# EAGLE board startlight.decoder.panel (EAGLE 7.3.0)
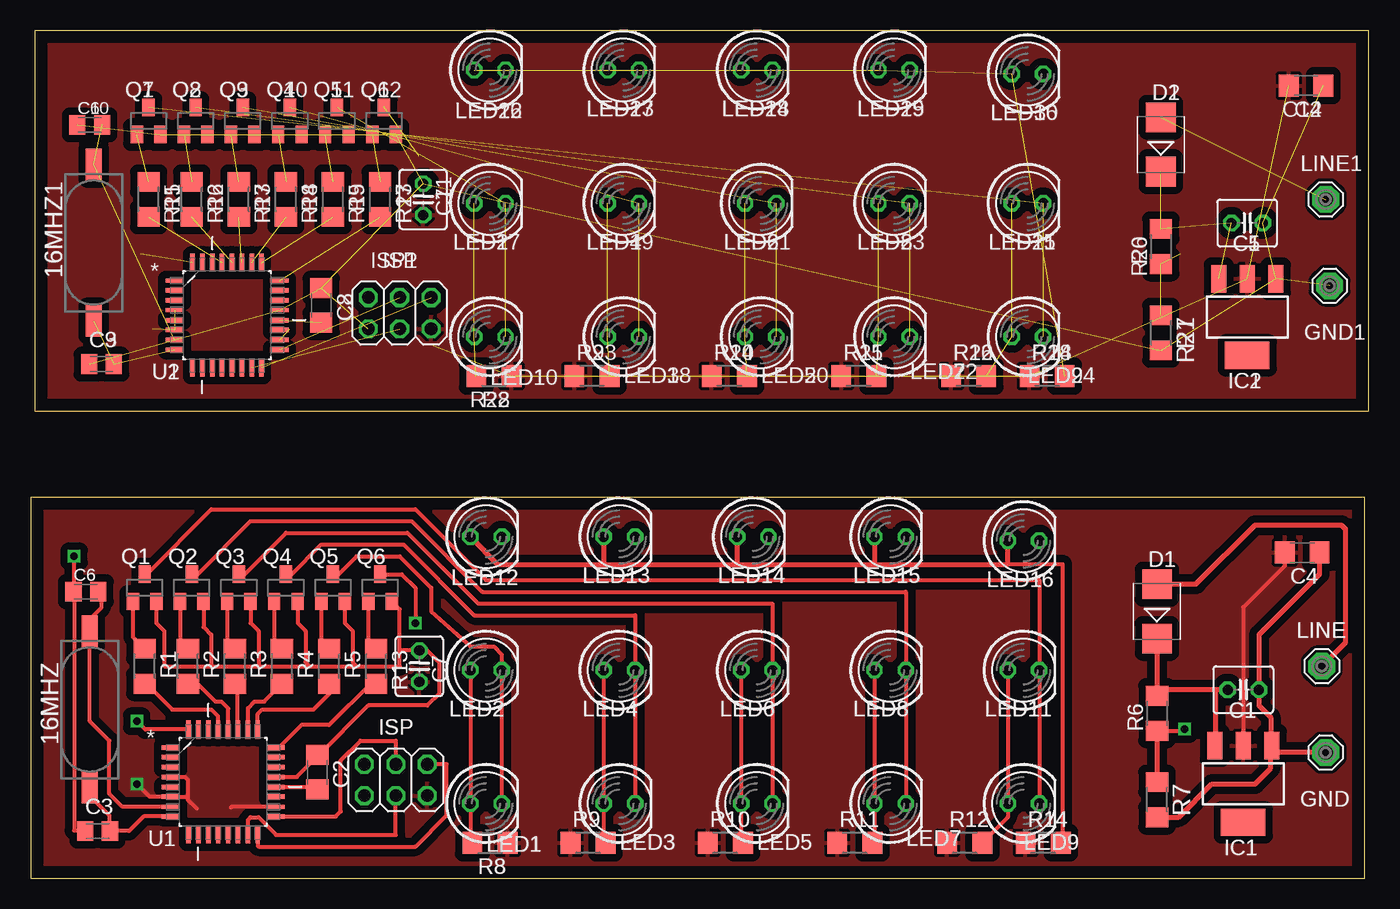
[diagram p0: board, top side]
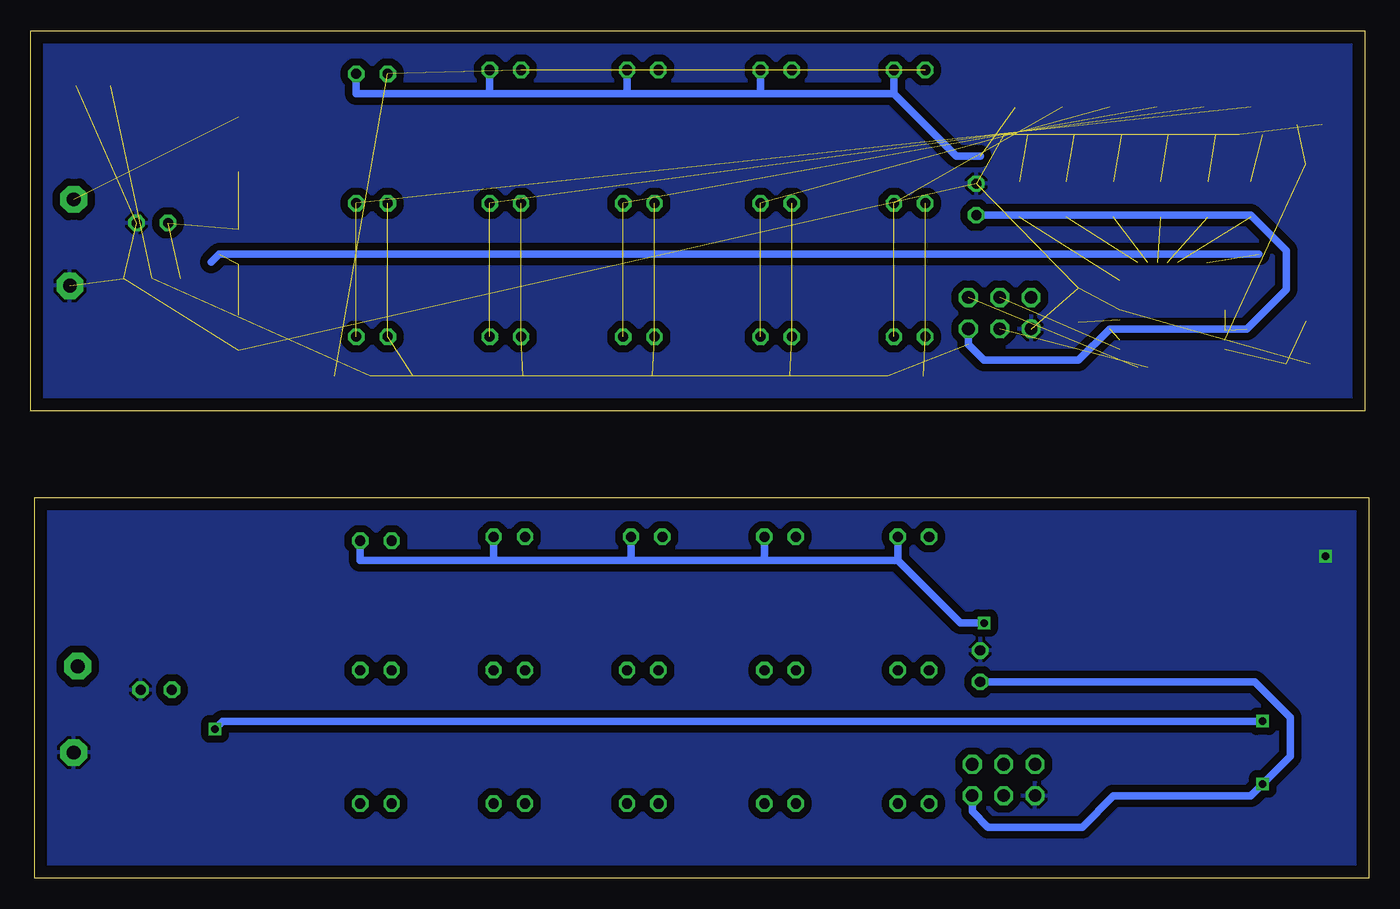
[diagram p1: board, bottom side, seen from below]

Size 108.25 x 68.57 mm. Coordinates in mm from the lower left corner, seen from the top.
Outline: 0,0 107.93,0 107.93,30.79 0,30.79 0,0
Outline: 0.32,37.78 108.25,37.78 108.25,68.57 0.32,68.57 0.32,37.78
Copper layers (1*16): Top 0.035mm / dielectric 1.5mm / Bottom 0.035mm
Design rules "default": minimum track width 10mil, minimum drill 24mil, track to track 8mil, track to pad 8mil, pad to pad 8mil, via to via 8mil, smd to smd 8mil, copper to edge 40mil, drill to drill 8mil, minimum pad ring 10mil, minimum via ring 8mil, stop-mask expansion 4mil, vias tented up to drill 0mil, thermal gap 10mil
Net classes: 0 default: width 0.406 mm, drill 0.406 mm, clearance 0.406 mm

## Footprints (pad centres in the part's own frame; a part is rotated, then mirrored left to right if it is on the bottom)
CSM-7X-DU = smd 2.54 x 1.27: 1 -6.338,0; 2 6.338,0
C025-040X050 = drill 0.813 octagon: 1 -1.27,0; 2 1.27,0
C1206 = smd 1.6 x 1.8: 1 -1.4,0; 2 1.4,0
C0805K = smd 1.3 x 1.6: 1 -1,0; 2 1,0
SMB = smd 2.4 x 2.4: A 2.2,0; C -2.2,0
SE11 = drill 1.118 pad 2.159 octagon: MP 0,0
SOT223 = smd 1.219 x 2.235: 1 -2.311,-3.099; 2 0,-3.099; 3 2.311,-3.099 | smd 3.6 x 2.2: 4 0,3.099
2X03 = drill 1.016 octagon: 1 -2.54,-1.27; 2 -2.54,1.27; 3 0,-1.27; 4 0,1.27; 5 2.54,-1.27; 6 2.54,1.27
LED5MM = drill 0.813 octagon: A -1.27,0; K 1.27,0
SOT23 = smd 1 x 1.4: 1 -0.95,-1.1; 2 0.95,-1.1; 3 0,1.1
R1206 = smd 1.6 x 1.803: 1 -1.422,0; 2 1.422,0
QFP80P900X900X120-32N = smd 1.473 x 0.356: 1 -4.242,2.794; 2 -4.242,2.007; 3 -4.242,1.194; 4 -4.242,0.406; 5 -4.242,-0.406; 6 -4.242,-1.194; 7 -4.242,-2.007; 8 -4.242,-2.794; 17 4.242,-2.794; 18 4.242,-2.007; 19 4.242,-1.194; 20 4.242,-0.406; 21 4.242,0.406; 22 4.242,1.194; 23 4.242,2.007; 24 4.242,2.794 | smd 0.356 x 1.473: 9 -2.794,-4.242; 10 -2.007,-4.242; 11 -1.194,-4.242; 12 -0.406,-4.242; 13 0.406,-4.242; 14 1.194,-4.242; 15 2.007,-4.242; 16 2.794,-4.242; 25 2.794,4.242; 26 2.007,4.242; 27 1.194,4.242; 28 0.406,4.242; 29 -0.406,4.242; 30 -1.194,4.242; 31 -2.007,4.242; 32 -2.794,4.242

## Placement (x,y rotation side)
16MHZ  CSM-7X-DU  [CSM-7X-DU]  4.76,13.65 90 top
16MHZ1  CSM-7X-DU  [CSM-7X-DU]  5.08,51.44 90 top
C1  100n  [C025-040X050]  98.11,15.24 0 top
C2  100n  [C1206]  23.18,8.57 270 top
C3  [C0805K]  5.4,3.81 0 top
C4  100n  [C1206]  102.87,26.35 180 top
C5  100n  [C025-040X050]  98.42,53.02 0 top
C6  [C0805K]  4.45,23.18 0 top
C7  [C025-040X050]  31.43,17.14 90 top
C8  100n  [C1206]  23.5,46.35 270 top
C9  [C0805K]  5.71,41.59 0 top
C10  [C0805K]  4.76,60.96 0 top
C11  [C025-040X050]  31.75,54.93 90 top
C12  100n  [C1206]  103.19,64.14 180 top
D1  ES2D  [SMB]  91.12,21.59 90 top
D2  ES2D  [SMB]  91.44,59.37 90 top
GND  SE11  [SE11]  104.78,10.16 0 top
GND1  SE11  [SE11]  105.09,47.94 0 top
IC1  [SOT223]  98.11,7.62 180 top
IC2  [SOT223]  98.42,45.4 180 top
ISP  [2X03]  29.53,7.94 180 top
ISP1  [2X03]  29.84,45.72 180 top
LED1  [LED5MM]  36.83,6.03 0 top
LED2  [LED5MM]  36.83,16.83 0 top
LED3  [LED5MM]  47.62,6.03 0 top
LED4  [LED5MM]  47.62,16.83 0 top
LED5  [LED5MM]  58.74,6.03 0 top
LED6  [LED5MM]  58.74,16.83 0 top
LED7  [LED5MM]  69.53,6.03 0 top
LED8  [LED5MM]  69.53,16.83 0 top
LED9  [LED5MM]  80.33,6.03 0 top
LED10  [LED5MM]  37.15,43.81 0 top
LED11  [LED5MM]  80.33,16.83 0 top
LED12  [LED5MM]  36.83,27.62 0 top
LED13  [LED5MM]  47.62,27.62 0 top
LED14  [LED5MM]  58.42,27.62 0 top
LED15  [LED5MM]  69.53,27.62 0 top
LED16  [LED5MM]  80.33,27.3 0 top
LED17  [LED5MM]  37.15,54.61 0 top
LED18  [LED5MM]  47.94,43.81 0 top
LED19  [LED5MM]  47.94,54.61 0 top
LED20  [LED5MM]  59.05,43.81 0 top
LED21  [LED5MM]  59.05,54.61 0 top
LED22  [LED5MM]  69.85,43.81 0 top
LED23  [LED5MM]  69.85,54.61 0 top
LED24  [LED5MM]  80.64,43.81 0 top
LED25  [LED5MM]  80.64,54.61 0 top
LED26  [LED5MM]  37.15,65.41 0 top
LED27  [LED5MM]  47.94,65.41 0 top
LED28  [LED5MM]  58.74,65.41 0 top
LED29  [LED5MM]  69.85,65.41 0 top
LED30  [LED5MM]  80.64,65.09 0 top
LINE  SE11  [SE11]  104.46,17.14 0 top
LINE1  SE11  [SE11]  104.78,54.93 0 top
Q1  BC846ASMD  [SOT23]  9.21,23.5 0 top
Q2  BC846ASMD  [SOT23]  13.02,23.5 0 top
Q3  BC846ASMD  [SOT23]  16.83,23.5 0 top
Q4  BC846ASMD  [SOT23]  20.64,23.5 0 top
Q5  BC846ASMD  [SOT23]  24.45,23.5 0 top
Q6  BC846ASMD  [SOT23]  28.26,23.5 0 top
Q7  BC846ASMD  [SOT23]  9.53,61.28 0 top
Q8  BC846ASMD  [SOT23]  13.34,61.28 0 top
Q9  BC846ASMD  [SOT23]  17.14,61.28 0 top
Q10  BC846ASMD  [SOT23]  20.95,61.28 0 top
Q11  BC846ASMD  [SOT23]  24.77,61.28 0 top
Q12  BC846ASMD  [SOT23]  28.57,61.28 0 top
R1  [R1206]  9.21,17.14 270 top
R2  [R1206]  12.7,17.14 270 top
R3  [R1206]  16.51,17.14 270 top
R4  [R1206]  20.32,17.14 270 top
R5  [R1206]  24.13,17.14 270 top
R6  [R1206]  91.12,13.34 90 top
R7  [R1206]  91.12,6.35 270 top
R8  [R1206]  37.15,2.86 180 top
R9  [R1206]  45.09,2.86 0 top
R10  [R1206]  56.2,2.86 0 top
R11  [R1206]  66.67,2.86 0 top
R12  [R1206]  75.56,2.86 0 top
R13  [R1206]  27.94,17.14 270 top
R14  [R1206]  81.92,2.86 0 top
R15  [R1206]  9.53,54.93 270 top
R16  [R1206]  13.02,54.93 270 top
R17  [R1206]  16.83,54.93 270 top
R18  [R1206]  20.64,54.93 270 top
R19  [R1206]  24.45,54.93 270 top
R20  [R1206]  91.44,51.12 90 top
R21  [R1206]  91.44,44.13 270 top
R22  [R1206]  37.47,40.64 180 top
R23  [R1206]  45.4,40.64 0 top
R24  [R1206]  56.52,40.64 0 top
R25  [R1206]  66.99,40.64 0 top
R26  [R1206]  75.88,40.64 0 top
R27  [R1206]  28.26,54.93 270 top
R28  [R1206]  82.23,40.64 0 top
U1  ATMEGA328P-AU  [QFP80P900X900X120-32N]  15.56,7.78 0 top
U2  ATMEGA328P-AU  [QFP80P900X900X120-32N]  15.88,45.56 0 top

## Library data of the parts
16MHZ 16MHZ1 = quarz; OC_FARNELL: unknown; OC_NEWARK: unknown
C1-C12 R1-R28 = rcl
D1 D2 = diode
GND GND1 LINE LINE1 = solpad
IC1 IC2 = sparkfun
ISP ISP1 = pinhead
LED1-LED30 = led
Q1-Q12 = transistor-npn
U1 U2 = atmega328; MPN: ATMEGA328P-AU; OC_FARNELL: 1715486; OC_NEWARK: 14R4631; PACKAGE: TQFP-32; SUPPLIER: Atmel

## Nets
GND: C1.2 C2.1 C3.1 C4.1 C6.1 C7.2 GND.MP IC1.1 ISP.6 Q1.2 Q2.2 Q3.2 Q4.2 Q5.2 Q6.2 R7.2 U1.21
GND2: C5.2 C8.1 C9.1 C10.1 C11.2 C12.1 GND1.MP IC2.1 ISP1.6 Q7.2 Q8.2 Q9.2 Q10.2 Q11.2 Q12.2 R21.2 U2.21
INT0: R6.1 R7.1 U1.32
INT2: R20.1 R21.1 U2.32
MISO: ISP.1 U1.16
MISO1: ISP1.1 U2.16
MOSI: ISP.4 U1.15
MOSI1: ISP1.4 U2.15
N$1: R5.2 U1.25
N$2: R4.2 U1.26
N$3: R3.2 U1.27
N$4: R2.2 U1.28
N$5: R1.2 U1.29
N$6: Q5.1 R5.1
N$7: Q4.1 R4.1
N$8: Q3.1 R3.1
N$9: Q2.1 R2.1
N$10: Q1.1 R1.1
N$11: D1.A LINE.MP
N$12: C1.1 D1.C IC1.3 R6.2
N$13: C2.2 U1.20
N$14: LED1.K LED2.K Q5.3
N$15: LED3.K LED4.K Q4.3
N$16: LED1.A LED2.A R8.2
N$17: LED5.K LED6.K Q3.3
N$18: LED3.A LED4.A R9.2
N$19: LED7.K LED8.K Q2.3
N$20: LED5.A LED6.A R10.2
N$21: LED9.K LED11.K Q1.3
N$22: LED7.A LED8.A R11.2
N$23: LED9.A LED11.A R12.2
N$24: Q6.1 R13.1
N$25: R13.2 U1.24
N$26: LED12.K LED13.K LED14.K LED15.K LED16.K Q6.3
N$28: LED12.A LED13.A LED14.A LED15.A LED16.A R14.2
N$29: 16MHZ1.2 C10.2 U2.7
N$30: 16MHZ.2 C6.2 U1.7
N$31: 16MHZ.1 C3.2 U1.8
N$32: 16MHZ1.1 C9.2 U2.8
N$33: R19.2 U2.25
N$34: R18.2 U2.26
N$35: R17.2 U2.27
N$36: R16.2 U2.28
N$37: R15.2 U2.29
N$38: Q11.1 R19.1
N$39: Q10.1 R18.1
N$40: Q9.1 R17.1
N$41: Q8.1 R16.1
N$42: Q7.1 R15.1
N$43: C5.1 D2.C IC2.3 R20.2
N$44: D2.A LINE1.MP
N$45: LED10.K LED17.K Q11.3
N$46: LED18.K LED19.K Q10.3
N$47: LED20.K LED21.K Q9.3
N$48: LED22.K LED23.K Q8.3
N$49: LED24.K LED25.K Q7.3
N$50: LED10.A LED17.A R22.2
N$51: LED18.A LED19.A R23.2
N$52: LED20.A LED21.A R24.2
N$53: LED22.A LED23.A R25.2
N$54: LED24.A LED25.A R26.2
N$56: Q12.1 R27.1
N$57: R27.2 U2.24
N$58: LED26.K LED27.K LED28.K LED29.K LED30.K Q12.3
N$59: LED26.A LED27.A LED28.A LED29.A LED30.A R28.2
N$60: C8.2 U2.20
RESET: ISP.5
RESET1: ISP1.5
SCK: ISP.3 U1.17
SCK1: ISP1.3 U2.17
VCC: C4.2 C7.1 IC1.2 ISP.2 R8.1 R9.1 R10.1 R11.1 R12.1 R14.1 U1.4 U1.6 U1.18
VCC1: C11.1 C12.2 IC2.2 ISP1.2 R22.1 R23.1 R24.1 R25.1 R26.1 R28.1 U2.4 U2.6 U2.18

## Tracks (layer width: path | path; a pad name or v marks a point on that pad's centre or on a via)
GND  (via drill 0.6 pad 0.61)
  Top 0.305: 14.61,17.14 10.79,17.14 10.79,20 10.16,20.64 Q1.2 | 14.61,17.14 18.41,17.14 | 18.41,17.14 22.54,17.14 | 22.54,17.14 26.35,17.14 | 26.35,17.14 29.84,17.14 29.84,18.41 | 29.84,18.41 29.84,21.76 Q6.2 | 29.84,18.41 C7.2 32.07,18.41 33.02,17.46 33.02,14.92 32.07,13.97 27.3,13.97 23.31,9.97 C2.1 23.68,9.84 23.18,9.84 21.52,8.19 U1.21 | C3.1 3.81,3.81 3.76,3.86 3.49,3.86 3.49,23.18 | C6.1 3.49,23.18 | 3.49,23.18 v3.49,26.04 | Q2.2 13.97,20.32 14.61,19.68 14.61,17.14 | Q3.2 17.78,20.64 18.41,20 18.41,17.14 | Q4.2 21.59,20.64 22.23,20 22.23,17.46 22.54,17.14 | Q5.2 25.4,20.64 26.04,20 26.04,17.46 26.35,17.14
  Top 0.406: GND.MP 100.98,10.16 100.81,10.32 | 100.81,10.32 IC1.1 100.33,10.81 100.33,13.02 99.38,13.97 C1.2 99.38,19.68 104.27,24.58 C4.1 | R7.2 92.88,4.93 95.57,7.62 99.06,7.62 100.33,8.89 100.33,9.84 100.81,10.32
  pour Bottom (isolate 0.61): 0,0 0,30.8 107.95,30.48 107.95,-0.32
GND2  (16 unrouted)
  pour Bottom (isolate 0.61): 0.32,37.78 0.32,68.58 108.27,68.26 108.27,37.47
INT0  (via drill 0.6 pad 0.61)
  Top 0.305: 12.72,12.06 U1.32 9.25,12.02 v8.57,12.7 | R6.1 93.19,11.91 v93.34,12.06
  Top 0.406: R6.1 R7.1
  Bottom 0.61: v8.57,12.7 92.71,12.7 v93.34,12.06
INT2  (3 unrouted)
  Bottom 0.61: 8.89,50.48 93.03,50.48 93.66,49.85
MISO
  Top 0.305: ISP.1 33.66,9.21 33.66,5.08 31.11,2.54 18.41,2.54 18.35,2.6 U1.16
MISO1  (1 unrouted)
MOSI
  Top 0.305: ISP.4 29.53,3.49 19.84,3.49 18.41,4.92 17.78,4.92 17.56,4.71 U1.15
MOSI1  (1 unrouted)
N$1
  Top 0.305: R5.2 24.45,15.24 22.86,13.65 18.73,13.65 18.35,13.27 U1.25
N$2
  Top 0.305: U1.26 17.56,13.75 18.1,14.29 18.88,14.29 R4.2
N$3
  Top 0.305: U1.27 16.75,15.33 R3.2
N$4
  Top 0.305: 12.85,15.72 R2.2 13.49,15.72 14.92,14.29 15.4,14.29 15.96,13.73 U1.28
N$5
  Top 0.305: U1.29 15.15,13.11 14.61,13.65 11.43,13.65 9.36,15.72 R1.2
N$6
  Top 0.305: Q5.1 23.5,19.2 R5.1
N$7
  Top 0.305: Q4.1 19.69,19.2 R4.1
N$8
  Top 0.305: Q3.1 15.88,19.2 R3.1
N$9
  Top 0.305: Q2.1 12.07,19.2 R2.1
N$10
  Top 0.305: Q1.1 8.26,19.52 R1.1
N$11
  Top 0.406: D1.A 94.28,23.79 99.06,28.57 106.05,28.57 106.36,28.26 106.36,19.05 LINE.MP
N$12
  Top 0.406: D1.C 91.12,15.24 | 91.12,15.24 R6.2 | C1.1 95.89,15.24 | 95.89,15.24 91.12,15.24 | IC1.3 95.89,10.72 95.89,15.24
N$13
  Top 0.305: U1.20 23.61,7.37 C2.2
N$14
  Top 0.305: LED1.K LED2.K 38.1,18.1 37.47,18.73 35.56,18.73 32.38,21.59 32.38,23.5 29.84,26.04 26.35,26.04 24.91,24.59 Q5.3
N$15
  Top 0.305: LED3.K LED4.K 48.9,21.27 35.88,21.27 30.16,26.99 23.5,26.99 21.1,24.59 Q4.3
N$16
  Top 0.305: LED2.A LED1.A 35.56,3.02 R8.2
N$17
  Top 0.305: LED5.K LED6.K 60.01,22.23 36.2,22.23 30.48,27.94 20.64,27.94 17.29,24.59 Q3.3
N$18
  Top 0.305: LED4.A LED3.A 46.35,3.34 R9.2
N$19
  Top 0.305: LED7.K LED8.K 70.8,23.18 36.51,23.18 30.8,28.89 17.78,28.89 13.48,24.59 Q2.3
N$20
  Top 0.305: LED6.A LED5.A 57.47,3.33 R10.2
N$21
  Top 0.305: LED9.K LED11.K 81.6,24.13 36.83,24.13 31.11,29.84 14.61,29.84 9.36,24.59 Q1.3
N$22
  Top 0.305: LED8.A LED7.A 68.26,3.02 R11.2
N$23
  Top 0.305: LED11.A LED9.A 79.06,4.93 R12.2
N$24
  Top 0.305: Q6.1 27.31,19.2 R13.1
N$25
  Top 0.305: U1.24 20.1,10.57 21.91,12.38 24.13,12.38 27.47,15.72 R13.2
N$26  (via drill 0.6 pad 0.61)
  Top 0.305: Q6.3 30.02,24.59 31.11,23.5 v31.11,20.64
  Bottom 0.61: v31.11,20.64 33.02,20.64 38.1,25.72 | 38.1,25.72 48.9,25.72 | 48.9,25.72 59.69,25.72 | 59.69,25.72 70.8,25.72 | 70.8,25.72 81.6,25.72 LED16.K | LED15.K 70.8,25.72 | LED12.K 38.1,25.72 | LED13.K 48.9,25.72 | LED14.K 59.69,25.72
N$28
  Top 0.305: R14.2 83.5,2.86 83.5,25.4 79.06,25.4
  Top 0.406: LED12.A 37.78,25.4 46.35,25.4 | 46.35,25.4 57.15,25.4 | 57.15,25.4 68.26,25.4 | 68.26,25.4 79.06,25.4 LED16.A | LED15.A 68.26,25.4 | LED14.A 57.15,25.4 | LED13.A 46.35,25.4
N$29  (2 unrouted)
N$30
  Top 0.305: C6.2 5.71,23.13 5.71,21.91 4.76,20.95 16MHZ.2 4.76,12.7 6.35,11.11 6.35,6.83 7.4,5.77 U1.7
N$31
  Top 0.305: 16MHZ.1 4.76,6.67 6.35,5.08 6.35,3.86 C3.2 7.94,3.81 9.11,4.99 U1.8
N$32  (2 unrouted)
N$33  (1 unrouted)
N$34  (1 unrouted)
N$35  (1 unrouted)
N$36  (1 unrouted)
N$37  (1 unrouted)
N$38  (1 unrouted)
N$39  (1 unrouted)
N$40  (1 unrouted)
N$41  (1 unrouted)
N$42  (1 unrouted)
N$43  (3 unrouted)
N$44  (1 unrouted)
N$45  (2 unrouted)
N$46  (2 unrouted)
N$47  (2 unrouted)
N$48  (2 unrouted)
N$49  (2 unrouted)
N$50  (2 unrouted)
N$51  (2 unrouted)
N$52  (2 unrouted)
N$53  (2 unrouted)
N$54  (2 unrouted)
N$56  (1 unrouted)
N$57  (1 unrouted)
N$58  (1 unrouted)
  Bottom 0.61: 31.43,58.42 33.34,58.42 38.42,63.5 | 38.42,63.5 49.21,63.5 | 49.21,63.5 60.01,63.5 | 60.01,63.5 71.12,63.5 | 71.12,63.5 81.92,63.5 LED30.K | LED29.K 71.12,63.5 | LED26.K 38.42,63.5 | LED27.K 49.21,63.5 | LED28.K 60.01,63.5
N$59  (5 unrouted)
N$60  (1 unrouted)
SCK
  Top 0.305: ISP.3 29.53,11.11 26.67,11.11 25.08,9.53 25.08,5.4 24.67,4.99 U1.17
SCK1  (1 unrouted)
VCC  (via drill 0.6 pad 0.61)
  Top 0.305: 12.7,6.67 12.7,7.94 12.45,8.19 U1.4 | 12.7,6.67 12.7,6.35 13.44,5.61 | 12.7,6.67 12.62,6.58 U1.6 9.61,6.58 v8.57,7.62 | C4.2 101.47,25.27 98.11,21.91 IC1.2 | U1.18 16.25,5.77 16.19,5.71
  Bottom 0.61: ISP.2 32.07,5.4 30.8,4.13 23.18,4.13 20.64,6.67 9.53,6.67 v8.57,7.62 6.35,9.84 6.35,13.02 9.21,15.88 C7.1
  pour Top (isolate 0.61): 0,30.8 107.95,30.8 107.95,0 0,0
VCC1  (11 unrouted)
  Bottom 0.61: ISP1.2 32.38,43.18 31.11,41.91 23.5,41.91 20.95,44.45 9.84,44.45 8.89,45.4 6.67,47.62 6.67,50.8 9.53,53.66 C11.1
  pour Top (isolate 0.61): 0.32,68.58 108.27,68.58 108.27,37.78 0.32,37.78

## Text on the board
_tNames: Q1 | Q2 | Q3 | Q4 | Q5 | Q6 | D1 | C4 | C6 | LED13 | LED14 | LED15 | LED12 | LED16 | LINE | R1 | R2 | R3 | R4 | R5 | R13 | C7 | R6 | ISP | LED2 | LED4 | LED6 | LED8 | LED11 | C1 | 16MHZ | C2 | R7 | GND | C3 | R9 | R10 | R11 | R12 | R14 | IC1 | U1 | LED1 | LED3 | LED5 | LED7 | LED9 | R8 | Q1 | Q2 | Q3 | Q4 | Q5 | Q6 | D1 | C4 | C6 | LED12 | LED13 | LED14 | LED15 | LED16 | LINE | R1 | R2 | R3 | R4 | R5 | R13 | C7 | R6 | ISP | LED2 | LED4 | LED6 | LED8 | LED11 | C1 | 16MHZ | C2 | R7 | GND | C3 | R9 | R10 | R11 | R12 | R14 | U1 | LED7 | IC1 | LED1 | R8 | LED3 | LED5 | LED9